# Allegro board demob3.brd
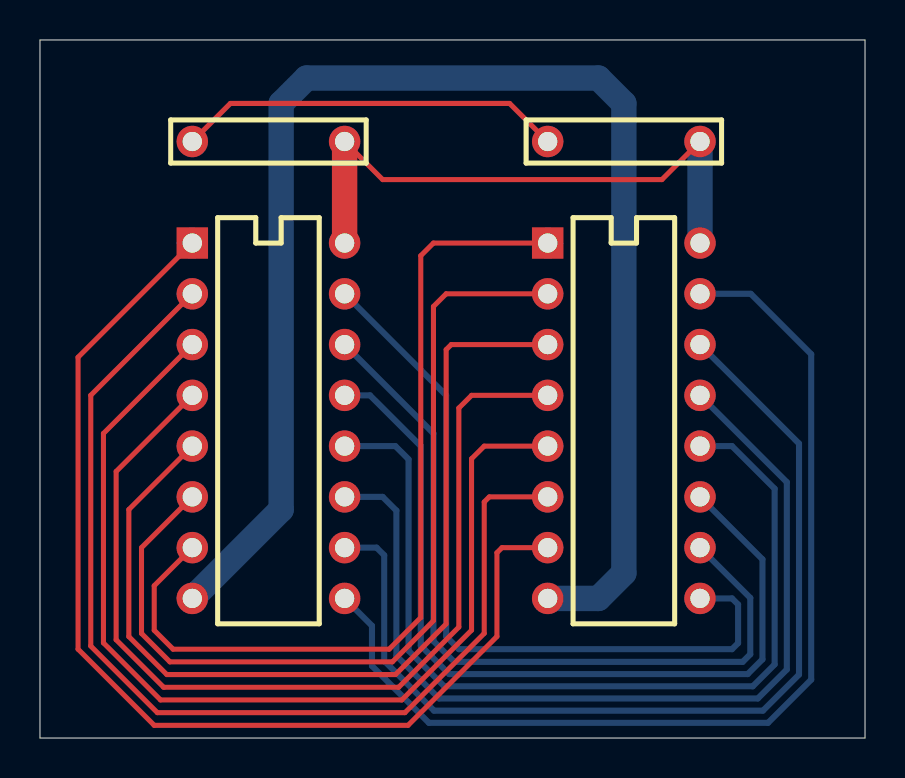
[diagram p0: board, top side]
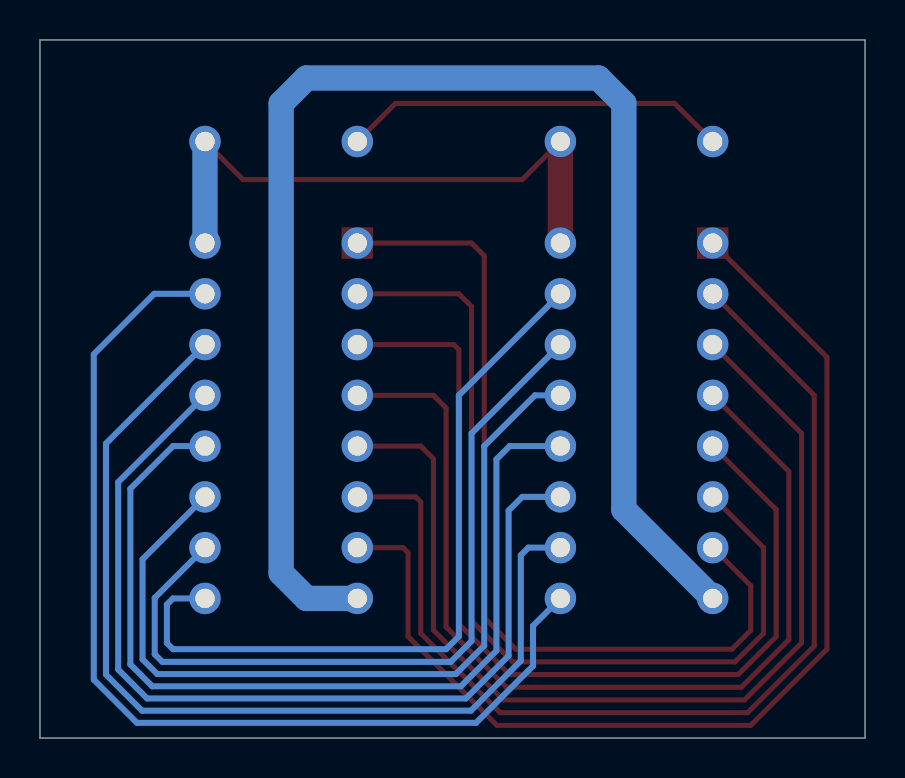
[diagram p1: board, bottom side, seen from below]

Outline 41.27 x 34.93 mm; copper layers: TOP, GND, POWER, INNER1, INNER2, BOTTOM. Coordinates in mm from the lower left corner of the outline.
Outline path: 0,34.93 41.27,34.93 41.27,0 0,0 0,34.93

## Design rules (mm)
nets with their own width: min track width 0.254; nets GND_SIGNAL
nets with their own width: min track width 0.305; nets N01899 N01900 N01901 N01902 N01903 N01904 N01905 N01906 N01907 N01908 N01909 N01910 N01911 N01912
nets with their own width: min track width 1.27; nets GND VCC

## Placement (name value [footprint] x y rotation side)
C1  CAP NP  [AC300100A]  15.24 29.85 180 top
C2  CAP NP  [AC300100A]  33.02 29.85 180 top
U1  74LS158  [DIP16]  7.62 24.77 270 top
U2  74LS158  [DIP16]  25.4 24.77 270 top

## Library data of the parts
C1 C2 = CAP_NP
U1 U2 = 74LS158

## Footprints (pads in the part's own frame, mm; a bottom-side part is the same pattern mirrored in y, then rotated)
AC300100A
  round 1.575 hole 0.965: 1(0,0) 2(7.62,0)
DIP16
  rect 1.575x1.575 hole 0.965: 1(0,0)
  round 1.575 hole 0.965: 2(2.54,0) 3(5.08,0) 4(7.62,0) 5(10.16,0) 6(12.7,0) 7(15.24,0) 8(17.78,0) 9(17.78,7.62) 10(15.24,7.62) 11(12.7,7.62) 12(10.16,7.62) 13(7.62,7.62) 14(5.08,7.62) 15(2.54,7.62) 16(0,7.62)

## Nets
GND: U1.8(TP-8) U2.8(TP-8)
GND_SIGNAL: C1.2(TP-2) C2.2(TP-2)
VCC: C1.1(TP-1) C2.1(TP-1) U1.16(TP-16) U2.16(TP-16)
N01899: U1.2(TP-2) U2.6(TP-6)
N01900: U1.3(TP-3) U2.5(TP-5)
N01901: U1.4(TP-4) U2.4(TP-4)
N01902: U1.5(TP-5) U2.3(TP-3)
N01903: U1.6(TP-6) U2.2(TP-2)
N01904: U1.7(TP-7) U2.1(TP-1)
N01905: U1.9(TP-9) U2.15(TP-15)
N01906: U1.10(TP-10) U2.14(TP-14)
N01907: U1.11(TP-11) U2.13(TP-13)
N01908: U1.12(TP-12) U2.12(TP-12)
N01909: U1.14(TP-14) U2.10(TP-10)
N01910: U1.1(TP-1) U2.7(TP-7)
N01911: U1.13(TP-13) U2.11(TP-11)
N01912: U1.15(TP-15) U2.9(TP-9)

## Routing (per net, layer and track width the routed paths; a pad name or vN(x,y) marks a point on that pad's centre or on a via; arc(x,y) is an arc through that point)
GND: length 72.6
  BOTTOM w1.27: U2.8 27.94,6.99 29.21,8.25 29.21,31.75 27.94,33.02 13.34,33.02 12.06,31.75 12.06,11.43 U1.8
GND_SIGNAL: length 19.4
  TOP w0.254: C2.2 23.5,31.75 9.53,31.75 C1.2
VCC: length 29.5
  TOP w0.254: C2.1 31.11,27.94 17.14,27.94 C1.1
  TOP w1.27: C1.1 U1.16
  BOTTOM w1.27: C2.1 U2.16
N01899: length 52.3
  TOP w0.254: U2.6 22.48,12.07 22.23,11.81 22.23,5.24 18.26,1.27 5.87,1.27 2.54,4.6 2.54,17.14 U1.2
N01900: length 50.5
  TOP w0.254: U1.3 3.17,15.24 3.17,4.76 6.03,1.91 18.1,1.91 21.59,5.39 21.59,13.97 22.23,14.61 U2.5
N01901: length 48.8
  TOP w0.254: U1.4 3.81,13.34 3.81,4.92 6.19,2.54 17.94,2.54 20.95,5.55 20.95,16.51 21.59,17.14 U2.4
N01902: length 47.5
  TOP w0.254: U2.3 20.57,19.68 20.32,19.43 20.32,5.71 17.79,3.17 6.34,3.17 4.45,5.07 4.45,11.43 U1.5
N01903: length 45.6
  TOP w0.254: U1.6 5.08,9.52 5.08,5.23 6.5,3.81 17.63,3.81 19.68,5.87 19.68,21.59 20.32,22.22 U2.2
N01904: length 44
  TOP w0.254: U1.7 5.71,7.62 5.71,5.39 6.66,4.45 17.47,4.45 19.05,6.02 19.05,24.13 19.68,24.77 U2.1
N01905: length 51.1
  BOTTOM w0.305: U2.15 35.56,22.22 38.58,19.2 38.58,2.92 36.42,0.76 19.46,0.76 16.61,3.61 16.61,5.62 U1.9
N01906: length 48.5
  BOTTOM w0.305: U1.10 16.84,9.52 17.22,9.14 17.22,3.86 19.71,1.37 36.17,1.37 37.97,3.17 37.97,14.73 U2.14
N01907: length 46.7
  BOTTOM w0.305: U1.11 17.14,12.07 17.83,11.38 17.83,4.11 19.97,1.98 35.91,1.98 37.36,3.43 37.36,12.8 U2.13
N01908: length 46
  BOTTOM w0.305: U2.12 34.62,14.61 36.75,12.47 36.75,3.68 35.66,2.59 20.22,2.59 18.44,4.37 18.44,13.94 17.78,14.61 U1.12
N01909: length 39.5
  BOTTOM w0.305: U2.10 35.53,7.01 35.53,4.19 35.15,3.81 20.73,3.81 19.68,4.85 19.68,15.24 U1.14
N01910: length 53.9
  TOP w0.254: U2.7 23.11,9.52 22.86,9.27 22.86,5.08 18.41,0.64 5.71,0.64 1.91,4.45 1.91,19.05 U1.1
N01911: length 42.3
  BOTTOM w0.305: U1.13 16.51,17.14 19.05,14.61 19.05,4.62 20.47,3.2 35.41,3.2 36.14,3.94 36.14,8.94 U2.11
N01912: length 38.2
  BOTTOM w0.305: U1.15 20.32,17.14 20.32,5.08 20.95,4.45 34.62,4.45 34.92,4.75 34.92,6.68 34.62,6.99 U2.9
